# Altium PCB BlueSource.PcbDoc
Units mm, origin at the board's own origin, x right, y up, seen from the top; angles counter-clockwise.
Board outline 50 x 47 mm, 6 copper layers (Top Layer, L1, L2, L3, L4, Bottom Layer), stack 1.65 mm thick; 47 components, 29 nets, 127 pads, 67 vias.
Unrouted connection lines stored in the file: 1.
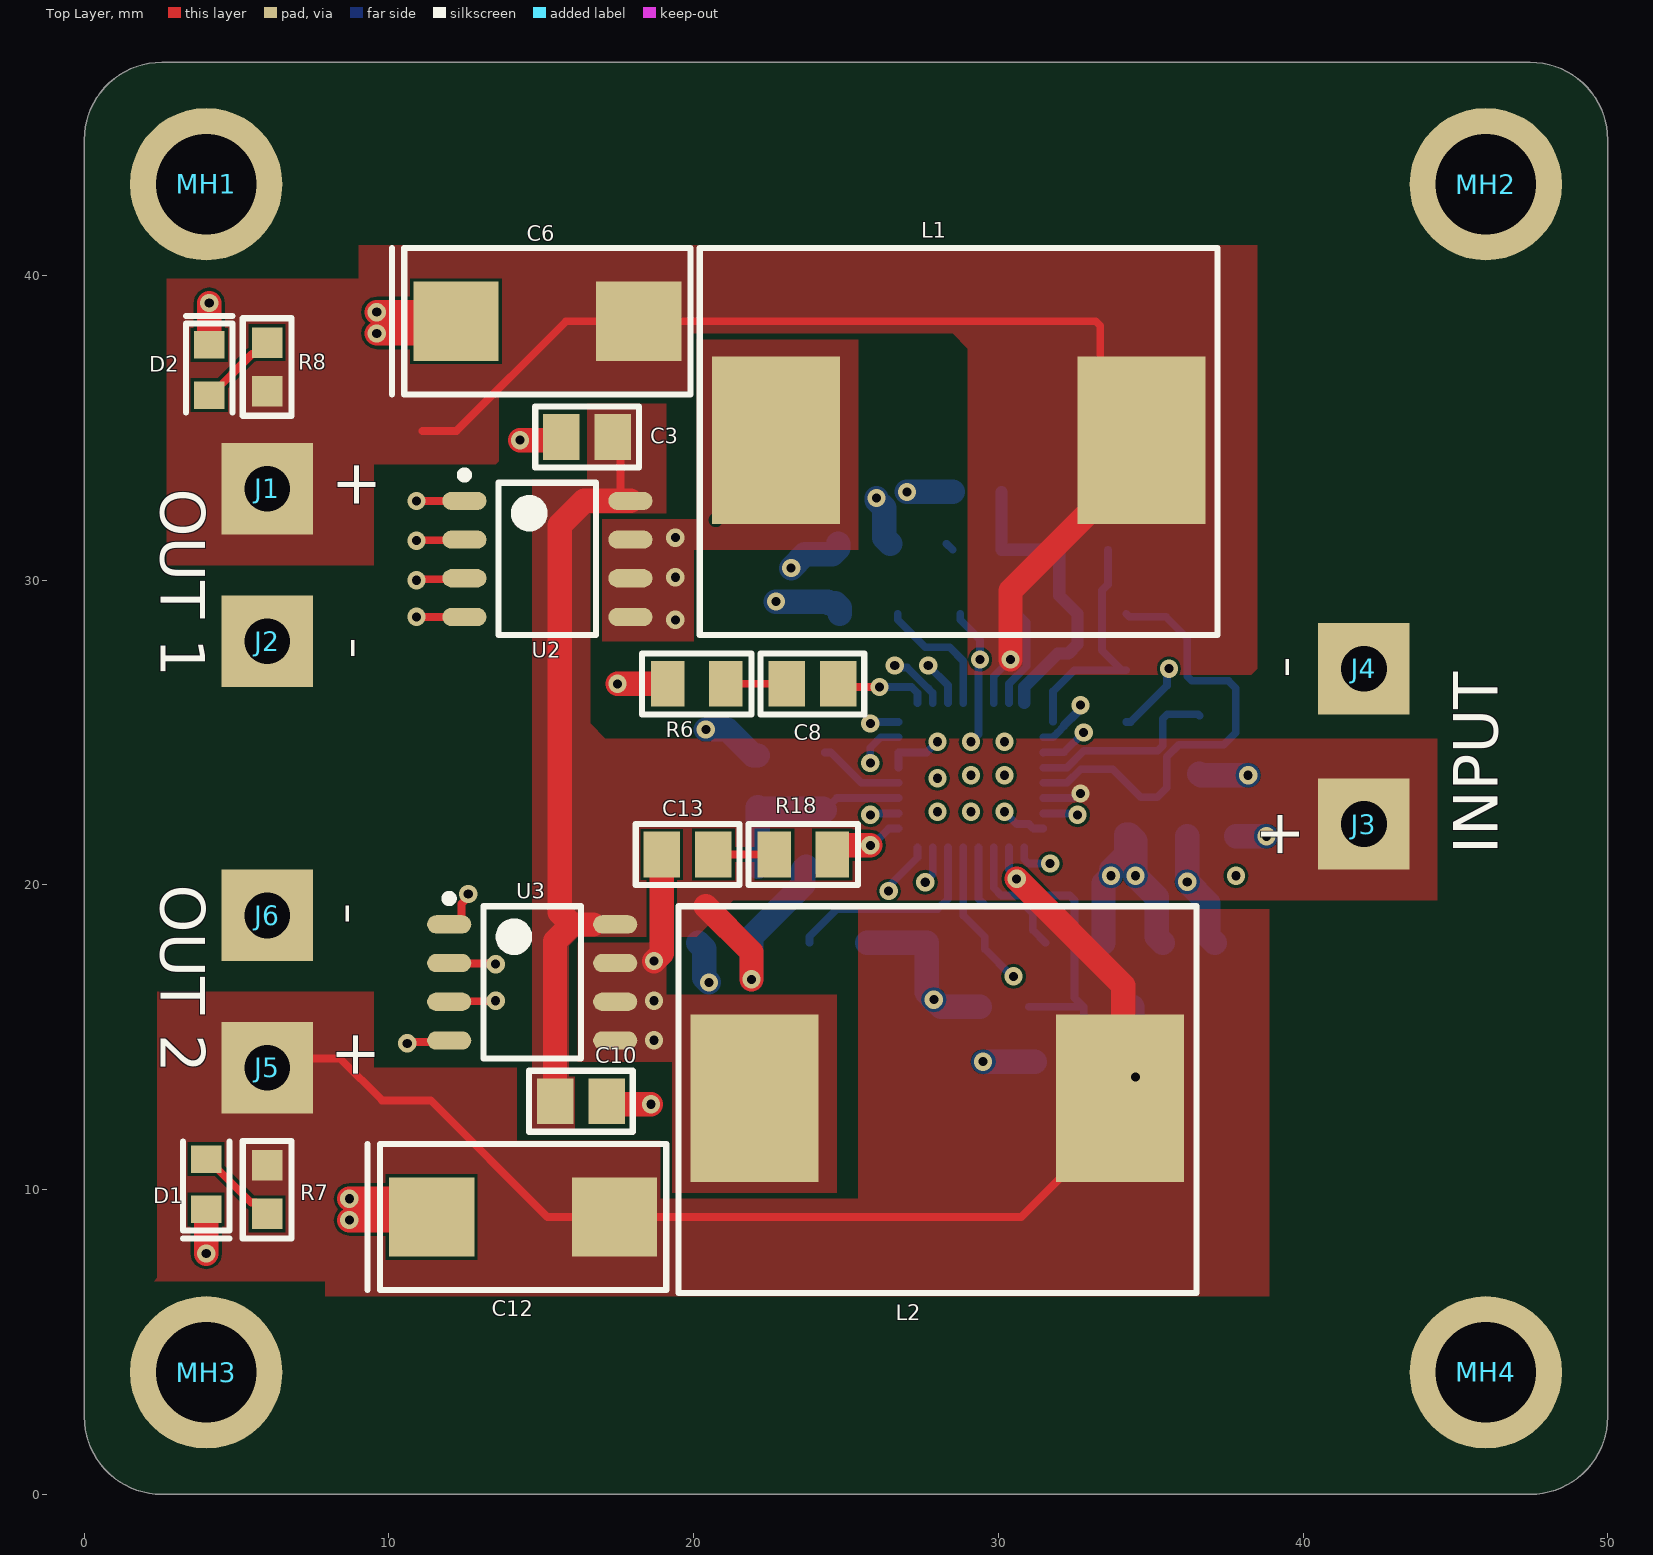
[diagram p0: Top Layer view]
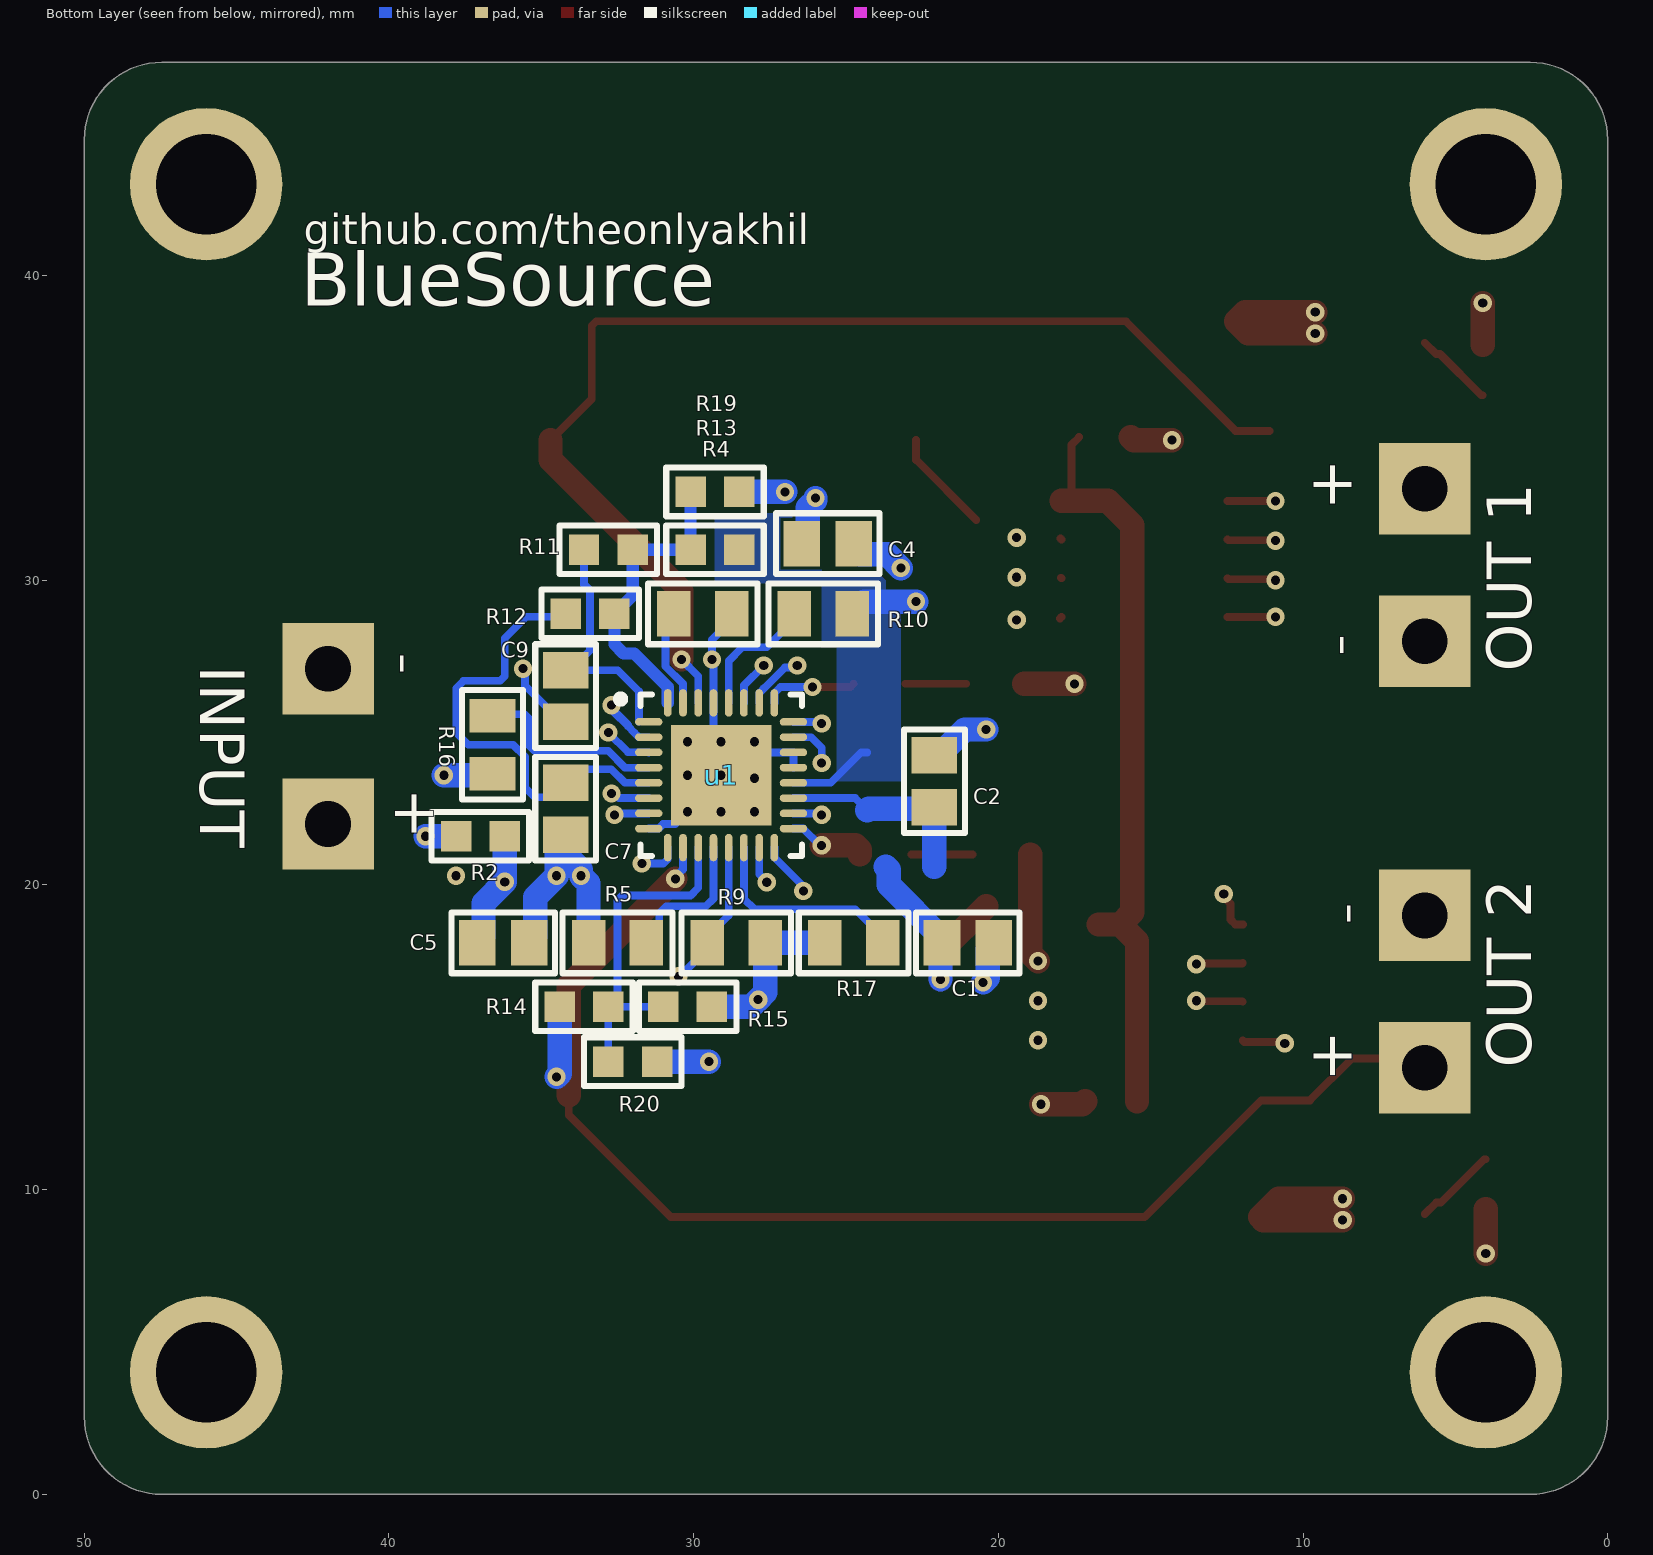
[diagram p1: Bottom Layer view, seen from below]
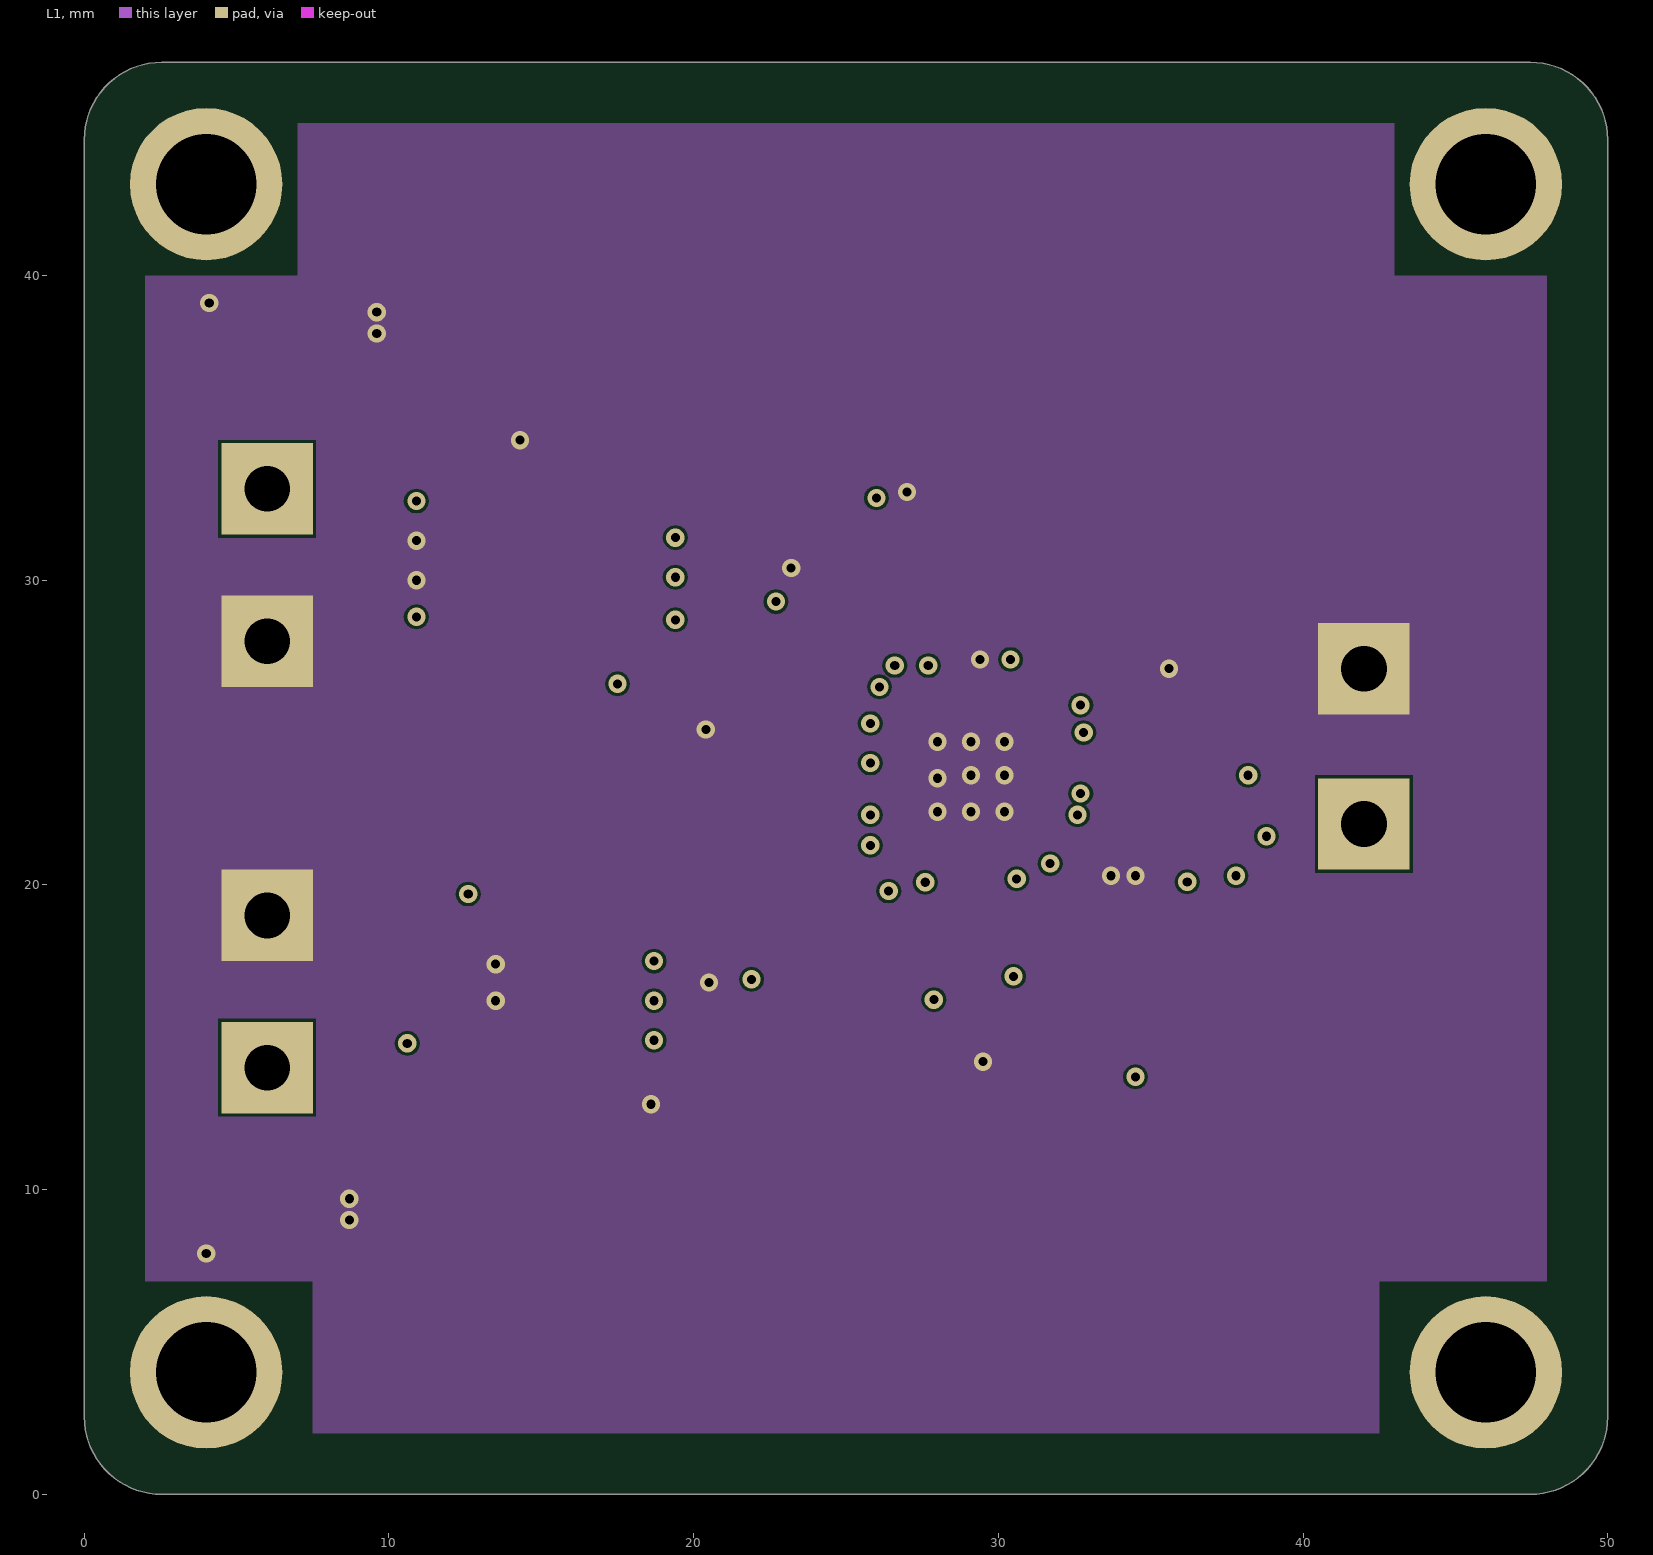
[diagram p2: L1]
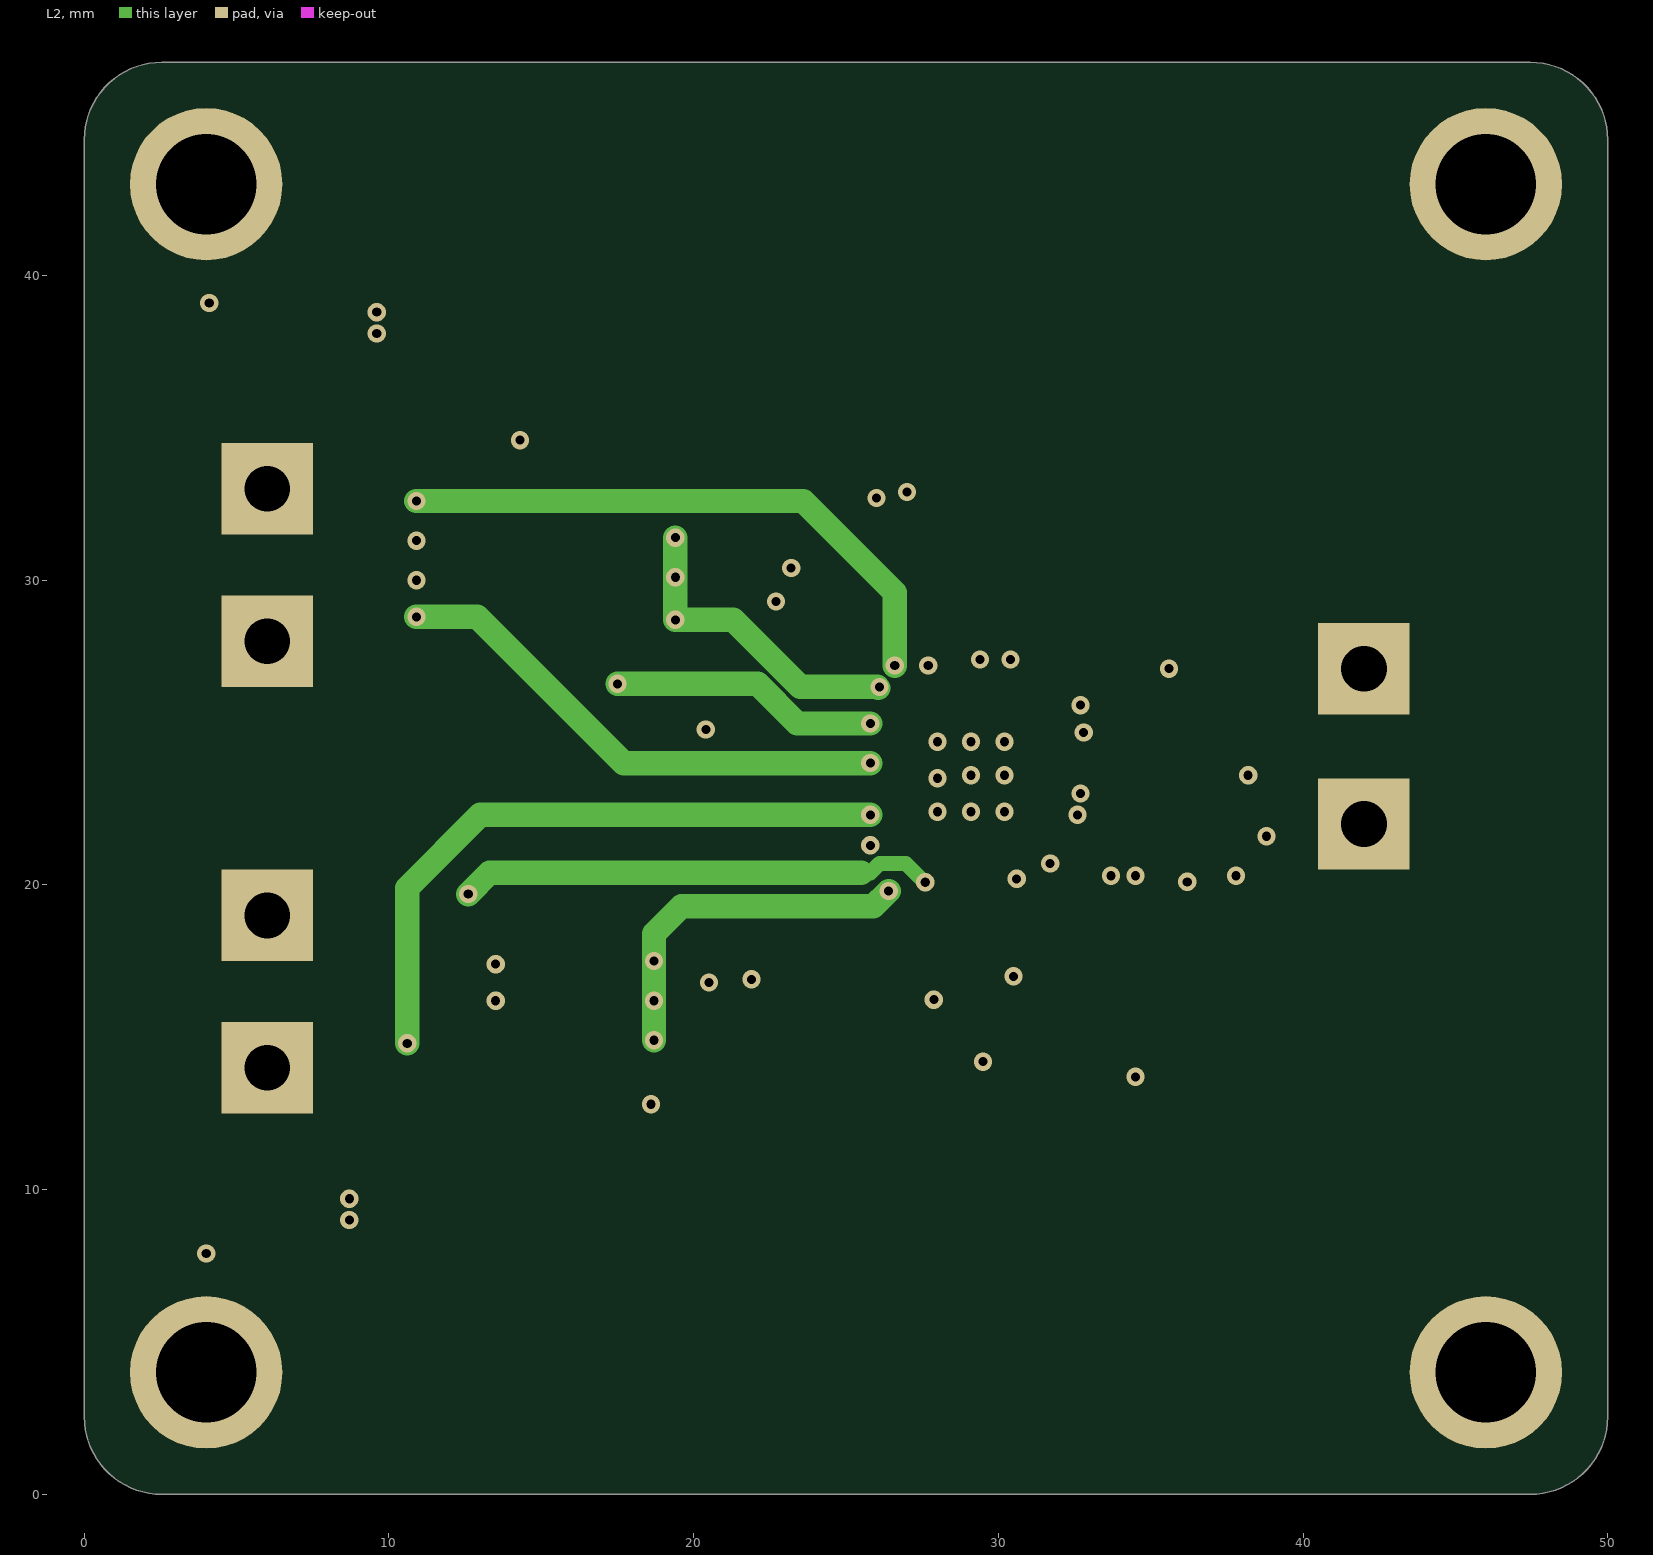
[diagram p3: L2]
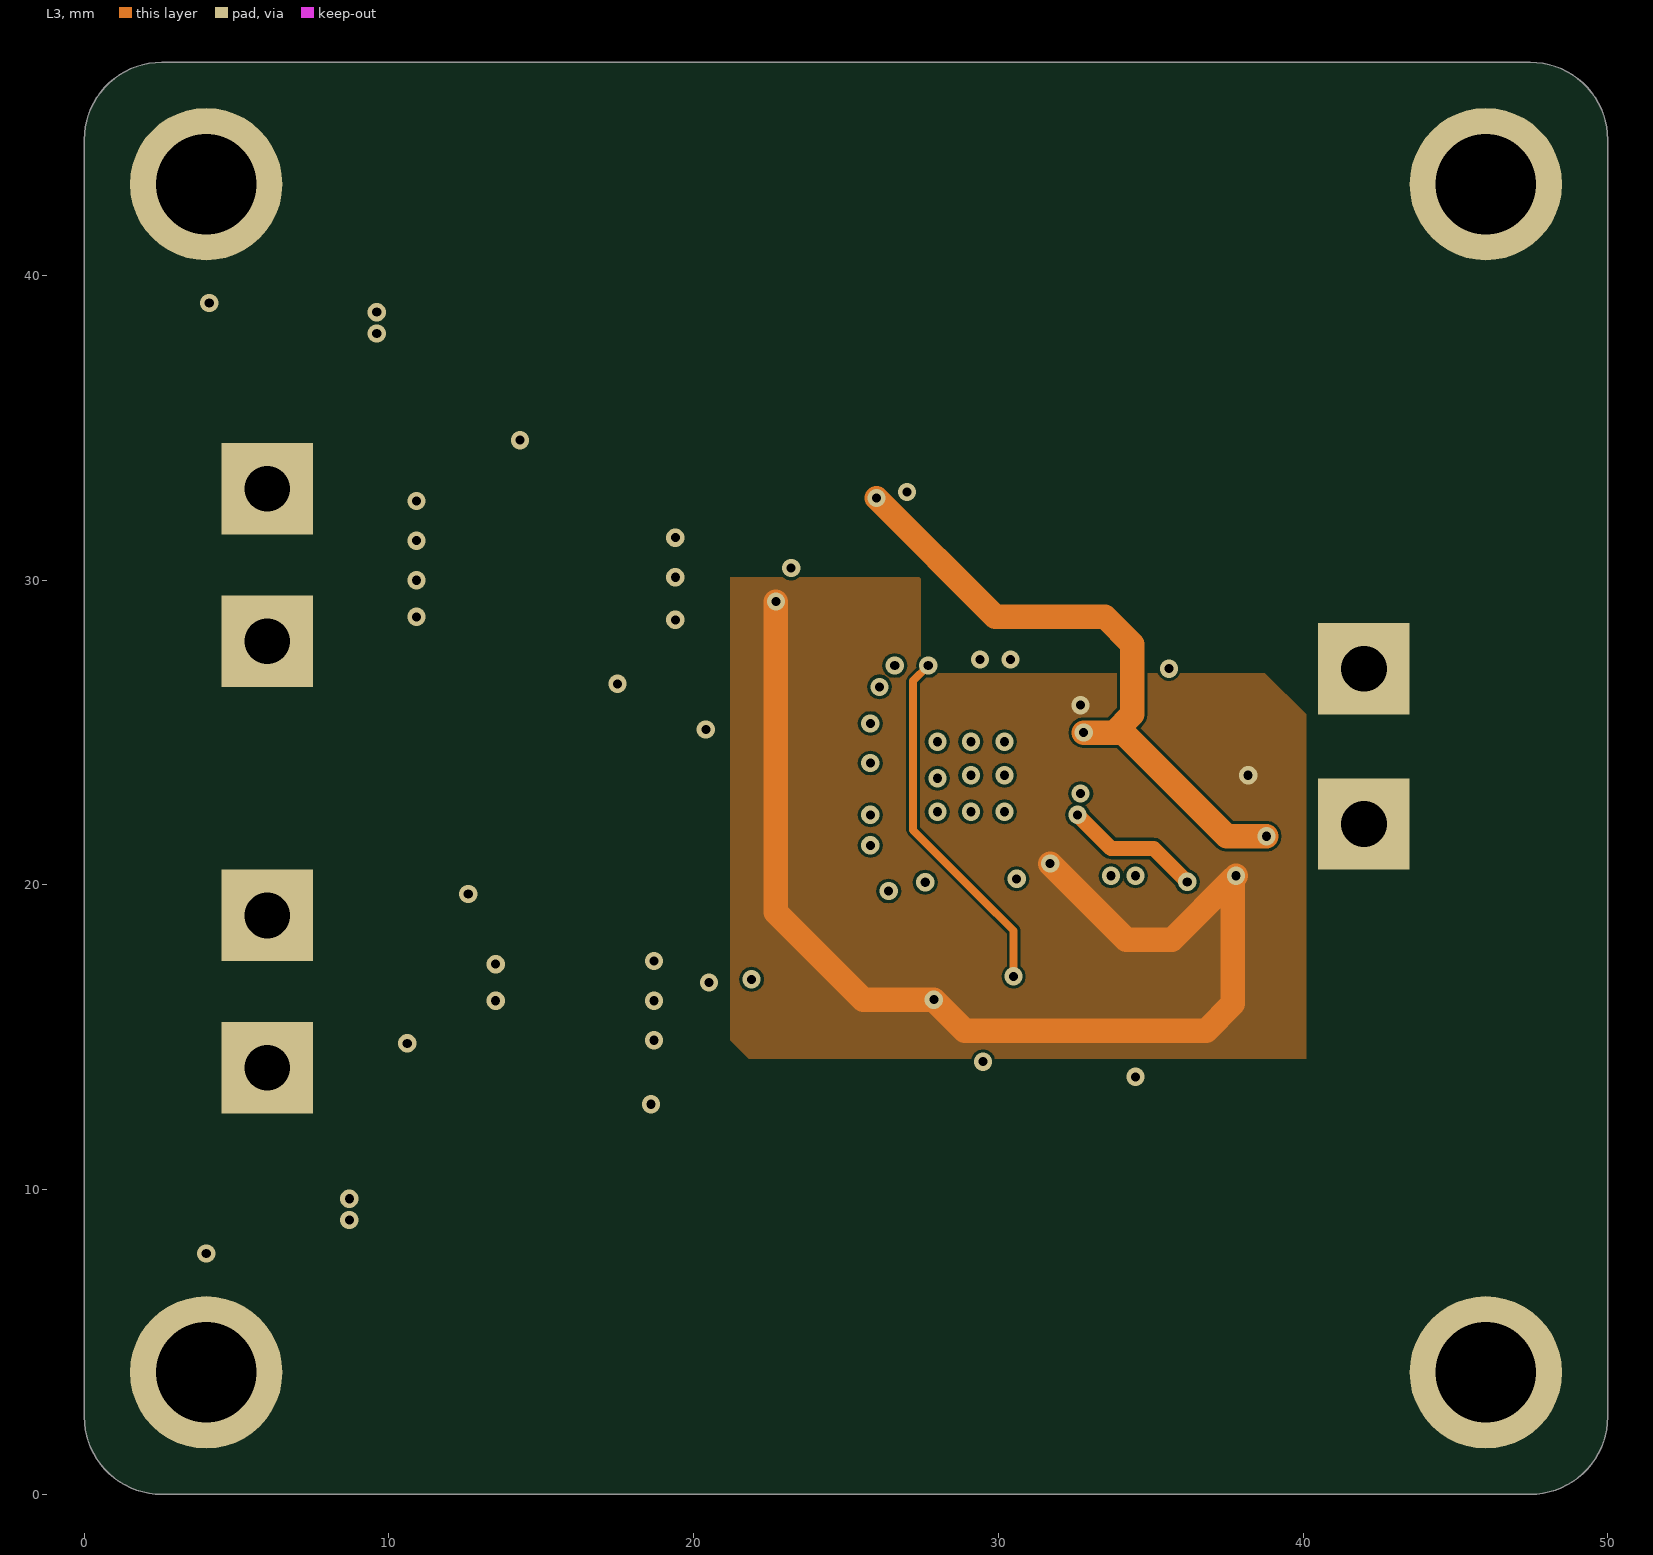
[diagram p4: L3]
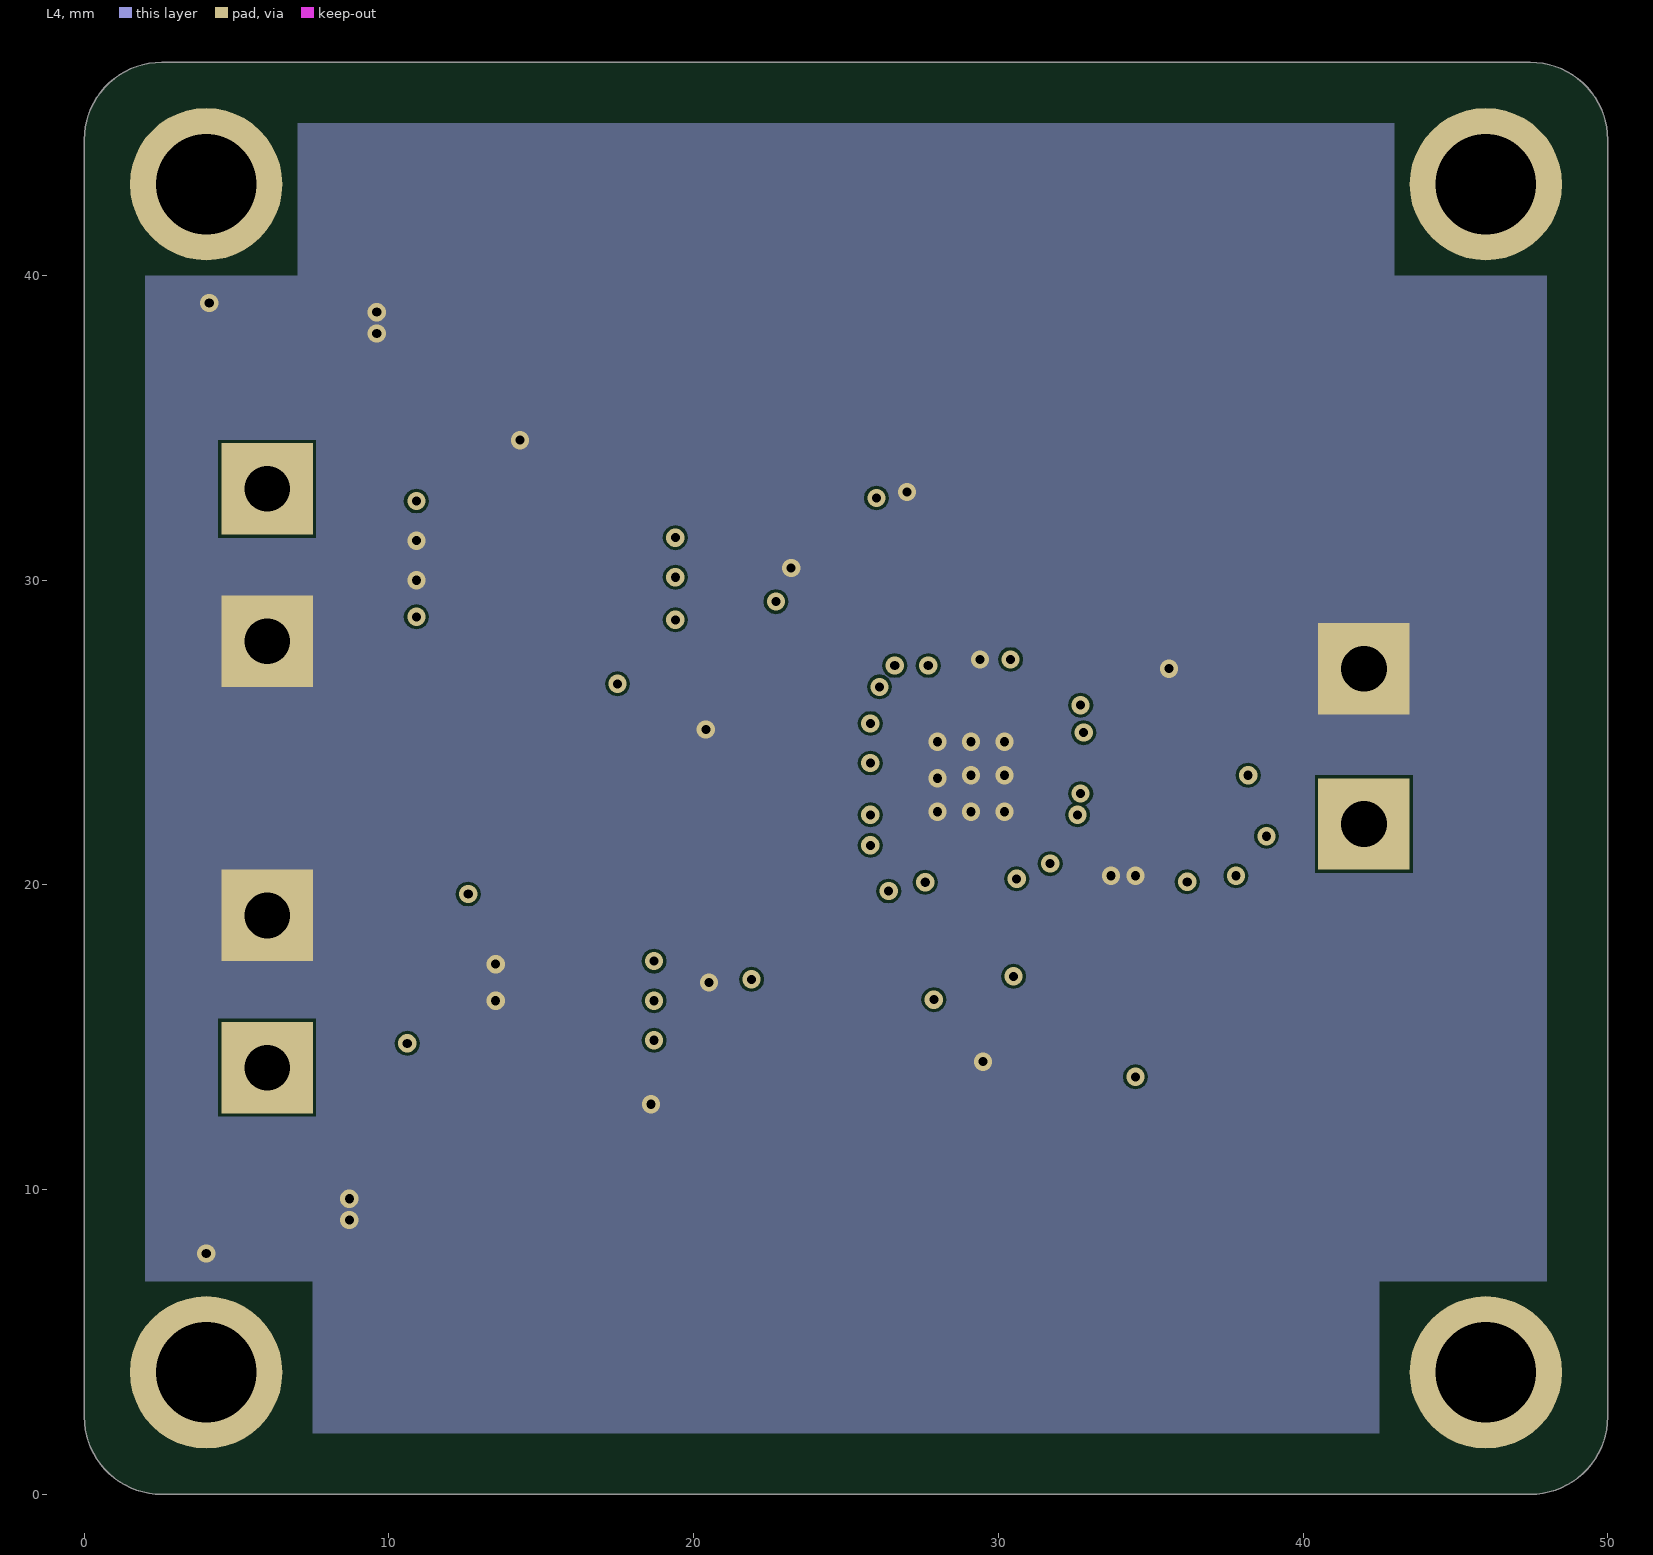
[diagram p5: L4]
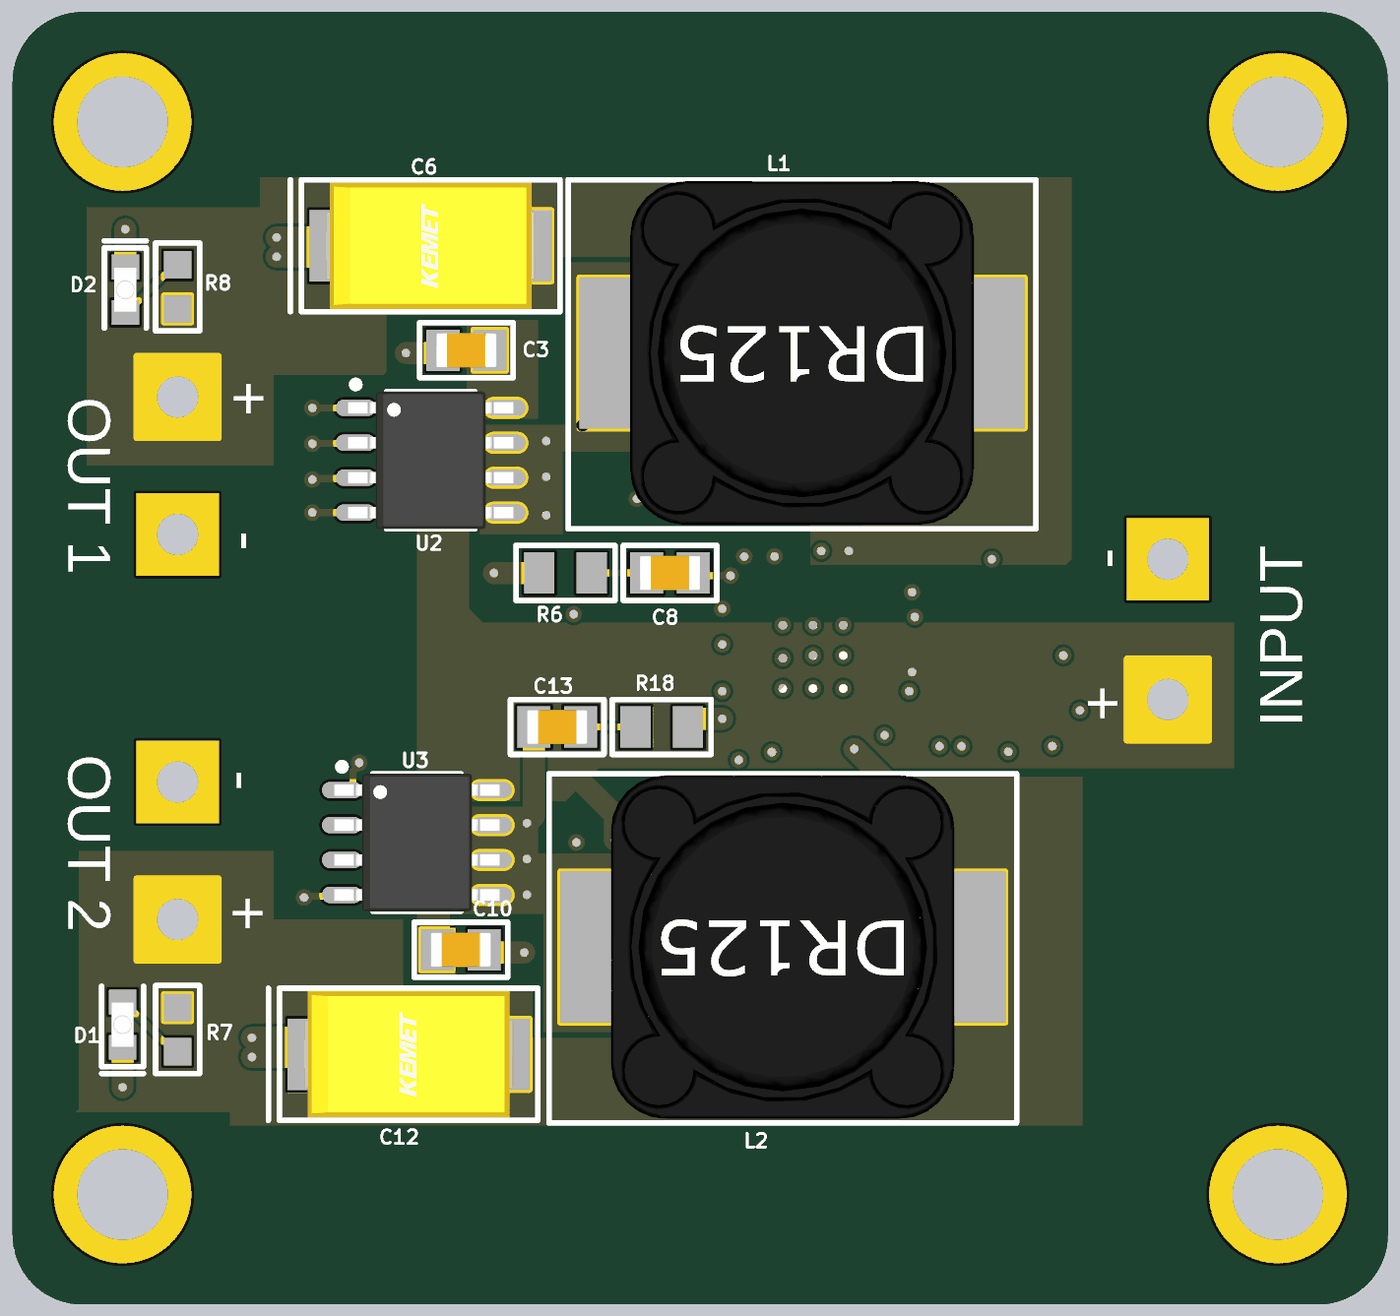
[diagram p6: 3D render of the assembled board from above, using the file's embedded part models]

## Layer stack, top to bottom
Top Solder: solder mask 0.0102, Solder Resist, Dk 3.5
Top Layer: signal copper 0.035
Dielectric 4: prepreg 0.12, PP-006, Dk 4.1
L1: signal copper 0.035
Dielectric 2: prepreg 0.36, PP-006, Dk 4.1
L2: signal copper 0.035
Dielectric 1: dielectric 0.48, FR-4, Dk 4.8
L3: signal copper 0.035
Dielectric 3: prepreg 0.36, PP-006, Dk 4.1
L4: signal copper 0.035
Dielectric 5: prepreg 0.12, PP-006, Dk 4.1
Bottom Layer: signal copper 0.035
Bottom Solder: solder mask 0.0102, Solder Resist, Dk 3.5

## Board outline
2.54,0 cw(c2.54,2.54) 0,2.54 0,44.46 cw(c2.54,44.46) 2.54,47 47.46,47 cw(c47.46,44.46) 50,44.46 50,2.54 cw(c47.46,2.54) 47.46,0

## Design rules (kind name [scope] priority, off if disabled: settings)
Clearance [All] p1: gap=0.1 ignorepadtopadclearanceinfootprint=FALSE
HoleToHoleClearance [All] p1: gap=0.305 allowstackedmicrovias=TRUE
MinimumSolderMaskSliver [All] p1: minsoldermaskwidth=0.1
PolygonConnect [All] p1: connectstyle=Direct reliefconductorwidth=0.254 reliefentries=4 polygonreliefangle="90 Angle" airgapwidth=0.254
RoutingVias [All] p1: holewidth=0.711 width=1.27 viastyle="Through Hole" minholewidth=0.711 minwidth=1.27 maxholewidth=0.711 maxwidth=1.27
SilkToSilkClearance [All] p1: silktosilkclearance=0.1
SilkToSolderMaskClearance [IsPad] p1: minsilkscreentomaskgap=0.1 clearancetoexposedcopper=TRUE
SolderMaskExpansion [All] p1: expansion=0.102 istentingtop=FALSE
UnRoutedNet [All] p1 off: checkbadconnections=TRUE
Width [All] p1: maxlimit=2 minlimit=0.254 preferedwidth=0.254 minimp=50.000000 maximp=50.000000 favimp=50.000000
25 further rules are at their usual default settings.

## Components (designator, comment, footprint, x,y, rotation, side; value= is the part's Value field where it differs from the comment)
C1 "1uF (50V)" Capacitor_0805 21,18.1 r0 bottom
C2 "1uF (50V)" Capacitor_0805 22.1,23.4 r270 bottom
C3 "10uF (35V)" Capacitor_0805 16.5,34.7 r0 top
C4 "1uF (50V)" Capacitor_0805 25.6,31.2 r180 bottom
C5 "4.7uF (10V)" Capacitor_0805 36.25,18.1 r0 bottom
C6 "330uF (10V)" C7343 15.2,38.5 r0 top
C7 "0.01uF (50V)" Capacitor_0805 34.2,22.5 r270 bottom
C8 "0.22uF (50V)" Capacitor_0805 23.9,26.6 r180 top
C9 "0.1uF(50V)" Capacitor_0805 34.2,26.2 r270 bottom
C10 "10uF (35V)" Capacitor_0805 16.3,12.9 r180 top
C12 "330uF (10V)" C7343 14.4,9.1 r0 top
C13 "0.22uF (50V)" Capacitor_0805 19.8,21 r0 top
D1 "LED GREEN" 0603_LED 4,10.175 r270 top
D2 "LED GREEN" 0603_LED 4.1,36.9 r90 top
J1 "MLPAD_3x3" MLPAD_3X3 6,33 r0 top
J2 "MLPAD_3x3" MLPAD_3X3 6,28 r0 top
J3 "MLPAD_3x3" MLPAD_3X3 42,22 r0 top
J4 "MLPAD_3x3" MLPAD_3X3 42,27.1 r0 top
J5 "MLPAD_3x3" MLPAD_3X3 6,14 r0 top
J6 "MLPAD_3x3" MLPAD_3X3 6,19 r0 top
L1 "6.8uH" DR125_Inductor 28.7,34.6 r0 top
L2 "8.2uH" DR125_Inductor 28,13 r0 top
MH1 "Mounting Hole" Mounting_Hole_3.3mm 4,43 r0 top
MH2 "Mounting Hole" Mounting_Hole_3.3mm 46,43 r0 top
MH3 "Mounting Hole" Mounting_Hole_3.3mm 4,4 r0 top
MH4 "Mounting Hole" Mounting_Hole_3.3mm 46,4 r0 top
R2 "0R(0603 in )" RESISTOR0603 37,21.6 r180 bottom
R4 "200K (1%)" RESISTOR0805 29.7,28.9 r180 bottom
R5 "200K (1%)" RESISTOR0805 32.5,18.1 r0 bottom
R6 "1R 1%" RESISTOR0805 20.1,26.6 r180 top
R7 "220R" RESISTOR0603 6,10 r90 top
R8 "165R(1%)" RESISTOR0603 6,37 r270 top
R9 "200K (1%)" RESISTOR0805 28.6,18.1 r180 bottom
R10 "200K (1%)" RESISTOR0805 25.75,28.9 r180 bottom
R11 "0R(0603 in )" RESISTOR0603 32.8,31 r0 bottom
R12 "0R(0603 in )" RESISTOR0603 33.4,28.9 r0 bottom
R13 "0R(0603 in )" RESISTOR0603 29.3,31 r180 bottom
R14 "0R(0603 in )" RESISTOR0603 33.6,16 r0 bottom
R15 "0R(0603 in )" RESISTOR0603 30.2,16 r180 bottom
R16 "10K" RESISTOR0805 36.6,24.6 r270 bottom
R17 "10K" RESISTOR0805 24.75,18.1 r0 bottom
R18 "1R 1%" RESISTOR0805 23.6,21 r0 top
R19 "0R(0603 in )" RESISTOR0603 29.3,32.9 r0 bottom
R20 "0R(0603 in )" RESISTOR0603 32,14.2 r0 bottom
u1 "ISL6236AIRZ" 32QFN 29.1,23.6 r180 bottom (schematic designator U1)
U2 "SI4816BDY-T1-E3" SOIC-8 15.2,30.7 r0 top
U3 "SI4816BDY-T1-E3" SOIC-8 14.7,16.8 r0 top

## Footprints (in the part's own frame and the unit in brackets; to place one, negate y for a bottom-side part, rotate by r counter-clockwise, add the part's x,y. Pads: shape width x height; smd on the part's side, far side on the other; paste and mask are expansions set on the pad)
32QFN [mm]
  oval 0.9x0.25 smd paste+0 mask+0: 1(-2.375,1.75)
  oval 0.9x0.25 smd mask+0.06: 2(-2.375,1.25) 3(-2.375,0.75) 4(-2.375,0.25) 5(-2.375,-0.25) 6(-2.375,-0.75) 7(-2.375,-1.25) 18(2.375,-1.25) 19(2.375,-0.75) 20(2.375,-0.25) 21(2.375,0.25) 22(2.375,0.75) 23(2.375,1.25)
  oval 0.9x0.25 smd mask+0: 8(-2.375,-1.75) 17(2.375,-1.75) 24(2.375,1.75)
  oval 0.25x0.9 smd mask+0: 9(-1.75,-2.375) 16(1.75,-2.375) 25(1.75,2.375) 32(-1.75,2.375)
  oval 0.25x0.9 smd mask+0.06: 10(-1.25,-2.375) 11(-0.75,-2.375) 12(-0.25,-2.375) 13(0.25,-2.375) 14(0.75,-2.375) 15(1.25,-2.375) 26(1.25,2.375) 27(0.75,2.375) 28(0.25,2.375) 29(-0.25,2.375) 30(-0.75,2.375) 31(-1.25,2.375)
  rect 3.3x3.3 smd mask+0.102: EP(0,0)
  silkscreen extent -3.42,-2.65 2.65,2.65, body extent -2.58,-2.58 2.58,2.58, height 1
0603_LED [mm] "SMD 0603 LED"
  rect 0.9x1 smd: 1(-0.825,0) 2(0.825,0)
  silkscreen extent -1.4,-0.76 1.78,0.76, body extent -0.8,-0.4 0.8,0.4, height 0.96
C7343 [mm]
  rect 2.8x2.6 smd: 1(-3,0) 2(3,0)
  silkscreen extent -5.1,-2.4 4.7,2.4, body extent -3.8,-2.3 3.8,2.3, height 4.31
Capacitor_0805 [mm] "Capacior 0805"
  rect 1.2x1.5 smd: 1(-0.85,0) 2(0.85,0)
  silkscreen extent -1.7,-1 1.7,1, body extent -1.1,-0.62 1.1,0.62, height 0.8
DR125_Inductor [mm]
  rect 4.2x5.5 smd: 1(-6,0) 2(6,0)
  silkscreen extent -8.5,-6.4 8.5,6.3, body extent -6.25,-6.25 6.25,6.25, height 8.01
MLPAD_3X3 [mm]
  rect 3x3 hole 1.5: 1(0,0)
Mounting_Hole_3.3mm [mm] "3.3mm Mounting Holes"
  round 5 hole 3.3: 1(0,0)
RESISTOR0603 [mm]
  rect 1x1 smd: 1(-0.8,0) 2(0.8,0)
  silkscreen extent -1.6,-0.8 1.6,0.8, body extent -0.9,-0.45 0.9,0.45, height 0.45
RESISTOR0805 [mm]
  rect 1.1x1.5 smd: 1(-0.95,0) 2(0.95,0)
  silkscreen extent -1.8,-1 1.8,1, body extent -1.1,-0.67 1.1,0.67, height 0.6
SOIC-8 [mm] "SOIC, 8-Leads, Body 4.90x3.90mm, Pitch 1.27mm, IPC Medium Density"
  oval 1.45x0.6 smd: 1(-2.725,1.905) 2(-2.725,0.635) 3(-2.725,-0.635) 4(-2.725,-1.905) 5(2.725,-1.905) 6(2.725,-0.635) 7(2.725,0.635) 8(2.725,1.905)
  silkscreen extent -2.85,-2.5 1.6,2.88, body extent -3,-2.5 3,2.5, height 1.7

## Part data
C1 C2 C4: library part CC0805JKX7R9BB105, "1µF ±5% 50V Ceramic Capacitor X7R 0805 (2012 Metric)", Manufacturer=Yageo, MaxTemp=125°C, MinTemp=-55°C, SupplierPartNumber=311-3498-1-ND, ComponentLink1Description=SupplierURL, ComponentLink1URL=https://www.digikey.com/en/products/detail/yageo/CC0805JKX7R9BB105/7164382, ManufacturerPartNumber=CC0805JKX7R9BB105, PartStatus=Active, Price=0.35, Supplier=Digikey
C3 C10: library part C2012X5R1V106K125AC, "10µF ±10% 35V Ceramic Capacitor X5R 0805 (2012 Metric)", Manufacturer="TDK Corporation", MaxTemp=85°C, MinTemp=-55°C, SupplierPartNumber=445-14418-1-ND, ComponentLink1Description=SupplierURL, ComponentLink1URL=https://www.digikey.com/en/products/detail/tdk-corporation/C2012X5R1V106K125AC/3951654, ManufacturerPartNumber=C2012X5R1V106K125AC, PartStatus=Active, Price=0.70000, Supplier=Digikey
C5: library part C0805C475J8RACAUTO, "4.7µF ±5% 10V Ceramic Capacitor X7R 0805 (2012 Metric)", Manufacturer=KEMET, MaxTemp=125°C, MinTemp=-55°C, SupplierPartNumber=399-15708-1-ND, ComponentLink1Description=SupplierURL, ComponentLink1URL=https://www.digikey.com/en/products/detail/kemet/C0805C475J8RACAUTO/7427538, ManufacturerPartNumber=C0805C475J8RACAUTO, PartStatus=Active, Price=0.53, Supplier=Digikey
C6 C12: library part T530X337M010ATE004, "330µF Molded Tantalum Polymer Capacitor 10V 2917 (7343 Metric) 4mOhm @ 100kHz", Manufacturer=KEMET, MaxTemp=125°C, MinTemp=-55°C, SupplierPartNumber=399-10378-1-ND, ComponentLink1Description=SupplierURL, ComponentLink1URL=https://www.digikey.com/en/products/detail/kemet/T530X337M010ATE004/3760653, ManufacturerPartNumber=T530X337M010ATE004, PartStatus=Active, Price=5.57, Supplier=Digikey
C7: library part C0805C103J5HACAUTO, "10000pF ±5% 50V Ceramic Capacitor X8R 0805 (2012 Metric)", Manufacturer=KEMET, MaxTemp=150°C, MinTemp=-55°C, SupplierPartNumber=399-15977-1-ND, ComponentLink1Description=SupplierURL, ComponentLink1URL=https://www.digikey.com/en/products/detail/kemet/C0805C103J5HACAUTO/7516211, ManufacturerPartNumber=C0805C103J5HACAUTO, PartStatus=Active, Price=0.79, Supplier=Digikey
C8 C13: library part C0805C224J5RACAUTO, "0.22µF ±5% 50V Ceramic Capacitor X7R 0805 (2012 Metric)", Manufacturer=399-C0805C224J5RACAUTOCT-ND, MaxTemp=125°C, MinTemp=-55°C, ComponentLink1Description=SupplierURL, ComponentLink1URL=https://www.digikey.com/en/products/detail/kemet/C0805C224J5RACAUTO/10642470, ManufacturerPartNumber=C0805C224J5RACAUTO, PartStatus=Active, Price=0.84, Supplier=Digikey, SupplierPartNumber=399-C0805C224J5RACAUTOCT-ND
C9: library part C0805C104J5RACTU, "0.1µF ±5% 50V Ceramic Capacitor X7R 0805 (2012 Metric)", Manufacturer=KEMET, MaxTemp=125°C, MinTemp=-55°C, SupplierPartNumber=399-1171-1-ND, ComponentLink1Description=SupplierURL, ComponentLink1URL=https://www.digikey.com/en/products/detail/kemet/C0805C104J5RACTU/411170, ManufacturerPartNumber=C0805C104J5RACTU, PartStatus=Active, Price=0.20, Supplier=Digikey
D1 D2: library part XZVG53W-8, "Green 570nm LED Indication - Discrete 2.1V 0603 (1608 Metric)", Max Temp=+85°C, Min Temp=-40°C, Supplier Part Number=1497-1215-1-ND, ComponentLink1Description="Supplier Link", ComponentLink1URL=https://www.digikey.com/en/products/detail/sunled/XZVG53W-8/4745971, Manufacturer Part Number=XZVG53W-8, Part Status=Active, Price=0.36
J1 J2 J3 J4 J5 J6: library part MLPAD_3X3
L1: library part DR125-6R8-R, "6.8µH Shielded Wirewound Inductor 6.64A 12.3mOhm Nonstandard", Manufacturer="Eaton - Electronics Division", MaxTemp=125°C, MinTemp=-40°C, SupplierPartNumber=513-1530-1-ND, ComponentLink1Description=SupplierURL, ComponentLink1URL=https://www.digikey.com/en/products/detail/eaton-electronics-division/DR125-6R8-R/667158, ManufacturerPartNumber=DR125-6R8-R, PartStatus=Active, Price=1.22, Suppplier=Digikey
L2: library part DR125-8R2-R, "8.2µH Shielded Wirewound Inductor 5.54A 17.6mOhm Nonstandard", Manufacturer="Eaton - Electronics Division", MaxTemp=125°C, MinTemp=-40°C, SupplierPartNumber=513-1823-1-ND, ComponentLink1Description=SupplierURL, ComponentLink1URL=https://www.digikey.com/en/products/detail/eaton-electronics-division/DR125-8R2-R/667161, ManufacturerPartNumber=DR125-8R2-R, PartStatus=Active, Price=1.22, Supplier=Digikey
MH1 MH2 MH3 MH4: library part 3MM_MOUNTING_HOLE, "3.3mm Mounting Hole"
R2 R11 R12 R13 R14 R15 R19 R20: library part RMCF0603ZT0R00, "0 Ohms Jumper 0.1W, 1/10W Chip Resistor 0603 (1608 Metric) Automotive AEC-Q200 Thick Film", Max Temp=155°C, Min Temp=-55°C, Supplier Part Number=RMCF0603ZT0R00CT-ND, ComponentLink1Description="Supplier Link", ComponentLink1URL=https://www.digikey.com/en/products/detail/stackpole-electronics-inc/RMCF0603ZT0R00/1756908, Manufacturer Part Number=RMCF0603ZT0R00, Part Status=Active, Price=0.10
R4 R5 R9 R10: library part ERJ-6ENF2003V, "200 kOhms ±1% 0.125W, 1/8W Chip Resistor 0805 (2012 Metric) Automotive AEC-Q200 Thick Film", Manufacturer="Panasonic Electronic Components", MaxTemp=155°C, MinTemp=-55°C, SupplierPartNumber=P200KCCT-ND, ComponentLink1Description=SupplierURL, ComponentLink1URL=https://www.digikey.com/en/products/detail/panasonic-electronic-components/ERJ-6ENF2003V/111933, ManufacturerPartNumber=ERJ-6ENF2003V, PartStatus=Active, Price=0.10, Supplier=Digikey
R6 R18: library part ERJ-6RQF1R0V, "1 Ohms ±1% 0.125W, 1/8W Chip Resistor 0805 (2012 Metric) Automotive AEC-Q200, Current Sense Thick Film", Manufacturer="Panasonic Electronic Components", MaxTemp=155°C, MinTemp=-55°C, SupplierPartNumber=P1.0DCT-ND, ComponentLink1Description=SupplierURL, ComponentLink1URL=https://www.digikey.com/en/products/detail/panasonic-electronic-components/ERJ-6RQF1R0V/250172, ManufacturerPartNumber=ERJ-6RQF1R0V, PartStatus=Active, Price=0.32, Supplier=Digikey
R7: library part RMCF0603JT220R, "220 Ohms ±5% 0.1W, 1/10W Chip Resistor 0603 (1608 Metric) Automotive AEC-Q200 Thick Film", Manufacturer="Stackpole Electronics Inc", MaxTemp=155°C, MinTemp=-55°C, SupplierPartNumber=RMCF0603JT220RCT-ND, ComponentLink1Description=SupplierURL, ComponentLink1URL=https://www.digikey.com/en/products/detail/stackpole-electronics-inc/RMCF0603JT220R/1758014, ManufacturerPartNumber=RMCF0603JT220R, PartStatus=Active, Price=0.10, Supplier=Digikey
R8: library part RMCF0603FT165R, "165 Ohms ±1% 0.1W, 1/10W Chip Resistor 0603 (1608 Metric) Automotive AEC-Q200 Thick Film", Manufacturer="Stackpole Electronics Inc", MaxTemp=155°C, MinTemp=-55°C, SupplierPartNumber=RMCF0603FT165RCT-ND, ComponentLink1Description=SupplierURL, ComponentLink1URL=https://www.digikey.com/en/products/detail/stackpole-electronics-inc/RMCF0603FT165R/1713658, ManufacturerPartNumber=RMCF0603FT165R, PartStatus=Active, Price=0.10, Supplier=Digikey
R16 R17: library part ERJ-6GEYJ103V, "10 kOhms ±5% 0.125W, 1/8W Chip Resistor 0805 (2012 Metric) Automotive AEC-Q200 Thick Film", Manufacturer="Panasonic Electronic Components", MaxTemp=155°C, MinTemp=-55°C, SupplierPartNumber=P10KACT-ND, ComponentLink1Description=SupplierURL, ComponentLink1URL=https://www.digikey.com/en/products/detail/panasonic-electronic-components/ERJ-6GEYJ103V/83062, ManufacturerPartNumber=ERJ-6GEYJ103V, PartStatus=Active, Price=0.10, Supplier=Digikey
u1: "- Controller, Notebook Power System Voltage Regulator IC 4 Output 32-QFN (5x5)", Manufacturer="Renesas Electronics America Inc", MaxTemp=100°C, MinTemp=-40°C, SupplierPartNumber=ISL6236AIRZ-ND, ComponentLink1Description=SupplierURL, ComponentLink1URL=https://www.digikey.com/en/products/detail/renesas-electronics-america-inc/ISL6236AIRZ/1976644, ManufacturerPartNumber=ISL6236AIRZ, Price=3.90080, Supplier=Digikey
U2 U3: "Mosfet Array 2 N-Channel (Half Bridge) 30V 5.8A, 8.2A 1W, 1.25W Surface Mount 8-SO", Manufacturer="Vishay Siliconix", MaxTemp=150°C, MinTemp=-55°C, SupplierPartNumber=SI4816BDY-T1-E3CT-ND, ManufacturerPartNumber=SI4816BDY-T1-E3, PartStatus=Active, Price=1.56, Supplier=Digikey, SupplierURL=https://www.digikey.com/en/products/detail/vishay-siliconix/SI4816BDY-T1-E3/1656470

## Via types
v1: diameter 0.6/0.6/0.6/0.6/0.6/0.6 (per signal layer), hole 0.3, Top Layer to Bottom Layer, tented both sides, 67 vias

## Nets (pads, with @x,y where several pads share a name; then routed paths per layer and width w, separated by ;. In a path a pad name is that pad's centre, name@x,y a point inside that pad or via, vN(x,y) a via of type N, cw(c..) or ccw(c..) an arc to the next point about the centre after c; other vN are vias at no path point)
+3V3: C6.2 J1.1 L1.2 R8.2 u1.30 | length 40.7
  Top Layer w0.254: J1.1 J1.1@7.373,34.373 ; 11.1,34.9 12.213,34.9 15.813,38.5 C6.2 33.2,38.5 33.349,38.351 33.349,35.951 L1.2
  Top Layer w0.8: v1(30.4,27.4) 30.4,29.65 34.7,33.95 L1.2
  Bottom Layer w0.254: u1.30 29.85,26.85 v1(30.4,27.4)
+5_VCC: C2.2 R9.2 R10.2 R13.2 R15.2 R16.2 R17.2 u1.2 u1.9 u1.19 u1.20 | length 62.7
  L3 w0.8: v1(22.7,29.3) 22.7,19.1 25.566,16.234 v1(27.884,16.234) 28.9,15.219 36.819,15.219 37.7,16.1 v1@37.7,20.2 ; v1(31.7,20.7) 34.2,18.2 35.7,18.2 v1@37.7,20.2 ; v1(37.8,20.3) v1@37.7,20.2
  Bottom Layer w0.254: 24.3,22.45 24.7,22.85 u1.19 ; 24.3,24.35 24.5,24.35 25.5,23.35 u1.20 ; R13.2@28.3,31.2 R13.2 ; u1.9 30.851,21.224 30.851,20.849 31,20.7 v1(31.7,20.7) ; u1.2 31.796,24.85 31.944,24.998 31.946,24.998 32.152,25.204 ; 32.152,25.204 32.634,25.686 v1@32.634,25.74 ; 32.152,25.204 32.152,25.252 32.527,25.627 32.527,25.633 v1@32.634,25.74 ; v1@32.634,25.74 32.7,25.806 v1(32.7,25.9) 32.634,25.834 v1@32.634,25.74
  Bottom Layer w0.8: 22.1,20.6 C2.2 22.15,22.5 24.25,22.5 24.3,22.45 ; v1(22.7,29.3) 24.4,29.3 24.45,29.25 24.65,29.25 24.8,29.1 R10.2 ; R17.2 R9.2 27.65,16.469 v1(27.884,16.234) 28.119,16 R15.2 ; R16.2 36.65,23.6 v1(38.2,23.6)
+5LDO: C5.2 R2.2 u1.7 | length 9.5
  L3 w0.5: v1(32.6,22.3) 33.7,21.2 35.1,21.2 v1(36.2,20.1)
  Bottom Layer w0.254: u1.7 31.477,22.348 32.552,22.348 v1(32.6,22.3)
  Bottom Layer w0.8: R2.2 v1(36.2,20.1) 36.9,19.4 36.9,18.3 C5.2
+5V0: C12.2 J5.1 L2.2 R7.2 R14.2 u1.10 | length 47.4
  Top Layer w0.254: J5.1 6.3,14.3 8.4,14.3 9.773,12.927 11.373,12.927 15.2,9.1 C12.2 30.75,9.1 34.1,12.45 L2.2@34.1,13.1
  Top Layer w0.8: v1(30.6,20.2) 34.1,16.7 ; L2.2@34.1,13.1 34.1,16.7 ; L2.2@34.1,13.7 34.1,16.7
  Bottom Layer w0.254: u1.10 30.35,20.509 30.6,20.259 v1(30.6,20.2)
  Bottom Layer w0.8: R14.2 34.4,13.8 v1(34.5,13.7)
+REF: C9.1 R11.2 u1.1 | length 8
  Bottom Layer w0.254: u1.1@31.798,25.352 31.798,26.354 32.494,27.05 C9.1@34.05,27.05 ; R11.2 33.6,29.863 33.4,29.663 33.4,27.7 C9.1@34.05,27.05 ; C9.1 C9.1@34.05,27.05
+VIN: C1.2 C3.2 C10.2 J3.1 u1.6 U2.8 U3.8 | length 33.7
  Top Layer w0.254: C3.2 17.6,34.45 17.6,32.765 U2.8@17.76,32.605
  Top Layer w0.8: C10.2 15.45,18.15 16,18.7 ; 16.7,18.7 16,18.7 ; U2.8 17.76,32.605 16.405,32.605 15.6,31.8 15.6,19.1 16,18.7 ; 20.4,19.3 21.9,17.8 v1(21.9,16.9)
  Bottom Layer w0.254: u1.6 32.456,22.85 32.606,23 v1(32.7,23)
  Bottom Layer w0.8: v1(21.9,16.9) 21.9,18.05 C1.2 21.85,18.25 23.6,20 23.6,20.5 23.7,20.6
+VREF3: C7.1 R12.2 u1.5 | length 15.2
  Bottom Layer w0.254: u1.5 32.253,23.35 32.701,23.799 33.751,23.799 C7.1 34.673,22.877 35.213,22.877 35.531,23.195 35.531,24.202 35.929,24.6 37.4,24.6 37.795,24.995 37.795,26.456 37.551,26.7 36.349,26.7 36.2,26.849 36.2,28.1 35.5,28.8 34.3,28.8 R12.2
BOOT1: R18.2 u1.17 | length 2.6
  Top Layer w0.8: R18.2 24.55,21.15 24.7,21.3 v1(25.8,21.3)
  Bottom Layer w0.254: v1(25.8,21.3) 25.854,21.3 26.404,21.85 u1.17
BOOT2: R6.2 u1.24 | length 11.4
  Top Layer w0.8: v1(17.5,26.6) R6.2
  L2 w0.8: v1(17.5,26.6) 22.1,26.6 23.4,25.3 v1(25.8,25.3)
  Bottom Layer w0.254: v1(25.8,25.3) 25.848,25.348 26.723,25.348 u1.24
EN1: R17.1 u1.14 | length 6.9
  Bottom Layer w0.254: R17.1 23.8,18.3 24.7,19.2 28,19.2 28.35,19.55 u1.14
EN_LDO: R16.1 u1.4 | length 6.4
  Bottom Layer w0.254: u1.4 32.252,23.85 32.802,24.4 35.228,24.4 35.4,24.572 35.4,25.451 35.549,25.6 36.55,25.6 R16.1
FB1: R14.1 R15.1 R20.2 u1.11 | length 11.4
  Bottom Layer w0.254: u1.11 29.85,19.904 30.1,19.654 32.346,19.654 32.5,19.5 32.5,16.3 R14.1 ; R15.1 R14.1 ; R20.2 R14.1
GND: C1.1 C2.1 C3.1 C4.2 C5.1 C6.1 C7.2 C9.2 C10.1 C12.1 D1.2 D2.2 J2.1 J4.1 J6.1 R4.2 R5.2 R19.1 R20.1 u1.8 u1.21 u1.22 u1.29 u1.EP U2.2 U2.3 U3.2 U3.3 | length 50.2
  Top Layer w0.254: v1(10.9,30) 10.932,30.033 12.442,30.033 U2.3 ; v1(10.9,31.3) 10.917,31.318 12.457,31.318 U2.2 ; U3.3 11.992,16.183 13.482,16.183 v1(13.5,16.2) ; U3.2 11.992,17.418 13.482,17.418 v1(13.5,17.4)
  Top Layer w0.8: v1(4,7.9) D1.2 ; D2.2 v1(4.1,39.1) ; v1(8.7,9) 11.3,9 C12.1 10.8,9.7 v1(8.7,9.7) ; v1(9.6,38.1) 11.8,38.1 C6.1 11.9,38.8 v1(9.6,38.8) ; v1(14.3,34.6) 15.55,34.6 C3.1 ; C10.1 17.25,12.8 v1(18.6,12.8)
  Bottom Layer w0.254: u1.21 u1.22 27.65,24.35 v1(28,24.7) ; R4.2 28.75,28.7 29.4,28.05 v1(29.4,27.4) 29.352,27.352 29.352,25.977 u1.29 29.35,24.95 v1(29.1,24.7) ; v1(30.2,22.4) 30.602,21.998 31.006,21.998 31.154,21.85 u1.8 ; C9.2 34.35,25.35 35.534,26.534 35.534,27.034 v1(35.6,27.1)
  Bottom Layer w0.8: C1.1 20.35,17.9 20.35,16.95 v1(20.5,16.8) ; v1(20.4,25.1) 21.1,25.1 21.95,24.25 C2.1 ; v1(23.2,30.4) 23.65,30.85 24.55,30.85 24.75,31.05 C4.2 ; v1(27,32.9) R19.1 ; v1(29.5,14.2) R20.1 ; R5.2 33.45,20.05 v1(33.7,20.3) 33.7,20.5 34.2,21 C7.2 34.3,21.65 34.5,21.45 v1(34.5,20.3) 35.2,19.6 35.2,18.3 C5.1
  other v1: 28,22.4 29.1,22.4 28,23.5 29.1,23.6 30.2,23.6 30.2,24.7
LGATE1: u1.18 U3.4 | length 23.7
  Top Layer w0.254: v1(10.6,14.8) 10.647,14.848 11.927,14.848 U3.4
  L2 w0.8: v1(10.6,14.8) 10.6,19.9 13,22.3 v1(25.8,22.3)
  Bottom Layer w0.254: v1(25.8,22.3) 25.848,22.348 26.723,22.348 u1.18
LGATE2: u1.23 U2.4 | length 20
  Top Layer w0.254: v1(10.9,28.8) 10.902,28.798 12.472,28.798 U2.4
  L2 w0.8: v1(10.9,28.8) 12.9,28.8 17.7,24 v1(25.8,24)
  Bottom Layer w0.254: v1(25.8,24) 25.8,24.506 26.142,24.848 26.723,24.848 u1.23
NetC4_1: C4.1 R2.1 u1.3 | length 25.2
  L3 w0.8: v1(26,32.7) 29.9,28.8 33.5,28.8 34.4,27.9 34.4,25.6 33.8,25 ; v1(32.8,25) 33.8,25 ; v1(38.8,21.6) 37.5,21.6 34.1,25 33.8,25
  Bottom Layer w0.254: u1.3 31.477,24.352 32.152,24.352 v1(32.8,25)
  Bottom Layer w0.8: v1(26,32.7) 26,32.627 26.25,32.377 26.25,31.4 C4.1 ; R2.1 v1(38.8,21.6)
NetC8_2: C8.2 R6.1 | length 2
  Top Layer w0.254: R6.1 C8.2
NetC13_2: C13.2 R18.1 | length 2
  Top Layer w0.254: C13.2@20.85,21 R18.1@22.85,21
NetD1_1: D1.1 R7.1 | length 2.7
  Top Layer w0.254: D1.1 4.05,11 5.477,9.573 5.627,9.573 R7.1
NetD2_1: D2.1 R8.1 | length 2.6
  Top Layer w0.254: D2.1 4.15,36.075 5.502,37.427 5.627,37.427 R8.1
NetR4_1: R4.1 u1.31 | length 3.3
  Bottom Layer w0.254: u1.31 30.35,26.605 30.927,27.182 30.927,28.623 R4.1
NetR5_1: R5.1 u1.12 | length 4.8
  Bottom Layer w0.254: u1.12 29.35,19.55 29.6,19.3 30.9,19.3 31.127,19.073 31.127,18.523 R5.1
PHASE1: C13.1 L2.1 u1.16 U3.5 U3.6 U3.7 | length 17.2
  Top Layer w0.8: v1(18.7,17.5) 18.95,17.75 C13.1
  L2 w0.8: v1(18.7,14.9) v1(18.7,16.2) v1(18.7,17.5) 18.7,18.4 19.6,19.3 25.9,19.3 v1(26.4,19.8)
  Bottom Layer w0.254: v1(26.4,19.8) 26.4,19.954 27.35,20.904 u1.16
PHASE2: C8.1 L1.1 u1.25 U2.5 U2.6 U2.7 | length 17
  Top Layer w0.254: U2.5 U2.5@17.972,28.748 ; U2.6 U2.6@17.942,30.083 ; U2.7 U2.7@17.957,31.368 ; v1@19.4,31.335 19.367,31.368 v1(19.4,31.4) ; L1.1@20.727,31.977 22.7,33.95 L1.1 ; C8.1 24.85,26.5 v1(26.1,26.5)
  L2 w0.8: v1(19.4,31.4) v1(19.4,30.1) v1(19.4,28.7) 21.3,28.7 23.5,26.5 26.027,26.5 v1@26.064,26.464
  Bottom Layer w0.254: v1(26.1,26.5) 27.146,26.5 27.35,26.296 u1.25
POK1: R9.1 u1.13 u1.27 | length 18.2
  L3 w0.254: v1(27.7,27.2) 27.2,26.7 27.2,21.8 29.4,19.6 30.5,18.5 v1(30.5,17)
  Bottom Layer w0.254: v1(27.7,27.2) 28.348,26.552 28.348,25.977 u1.27 ; u1.13 28.85,19 29.55,18.3 R9.1 29.55,17.9 30.45,17 v1(30.5,17)
POK2: R10.1 u1.28 | length 4.3
  Bottom Layer w0.254: R10.1 26.7,28.7 27.6,27.8 28.4,27.8 28.85,27.35 u1.28
REFIN2: R11.1 R12.1 R13.1 R19.2 u1.32 | length 10
  Bottom Layer w0.4: R19.2 R13.1 R11.1 32,29.5 R12.1 32.6,27.9 32.3,27.6 31.949,27.6 30.85,26.501 u1.32
UGATE1: u1.15 U3.1 | length 18.3
  Top Layer w0.254: U3.1@11.972,18.703 U3.1 12.22,18.705 12.38,18.865 12.38,19.386 12.6,19.606 v1(12.6,19.7)
  L2 w0.5: 25.5,20.4 25.8,20.4 26.1,20.7 26.96,20.7 27.573,20.088 v1(27.6,20.088)
  L2 w0.8: v1(12.6,19.7) 13.3,20.4 25.5,20.4
  Bottom Layer w0.254: v1(27.6,20.088) 27.6,20.1 27.848,20.348 27.848,21.223 u1.15
UGATE2: u1.26 U2.1 | length 22.9
  Top Layer w0.254: v1(10.9,32.6) 10.902,32.603 12.472,32.603 U2.1
  L2 w0.8: v1(10.9,32.6) 23.6,32.6 26.6,29.6 v1(26.6,27.2)
  Bottom Layer w0.254: v1(26.6,27.2) 26.666,27.134 27.014,27.134 27.704,26.444 27.704,26.442 27.85,26.296 u1.26
pads on no net: MH1.1 MH2.1 MH3.1 MH4.1

## Polygon pours and split planes (outlines as drawn)
+5V0 on Top Layer "+5V0_L01_P013" (solid, remove dead copper, pour order 13): 2.4,16.5 9.5,16.5 9.5,14 14.2,14 14.2,11.6 18.9,11.6 18.9,9.7 25.4,9.7 25.4,19.2 38.9,19.2 38.9,6.5 7.9,6.5 7.9,7 2.3,7 2.4,7.1
PHASE1 on Top Layer "PHASE1_L01_P002" (solid, remove dead copper, pour order 2): 16.2,18.1 16.2,14.2 19.3,14.2 19.3,9.9 24.7,9.9 24.7,16.4 19.1,16.4 19.1,18.1
+VIN on Top Layer "+VIN_L01_P008" (solid, remove dead copper, pour order 8): 14.7,33.3 16.5,33.3 16.5,35.8 19.1,35.8 19.1,32.2 16.6,32.2 16.6,25.3 17.1,24.8 44.4,24.8 44.4,19.5 21.3,19.5 20.1,18.3 16.2,18.3 15.9,18 15.9,13.7 16.1,13.7 16.1,12 14.7,12
+3V3 on Top Layer "+3V3_L01_P012" (solid, remove dead copper, pour order 12): 2.7,39.9 2.7,30.5 9.5,30.5 9.5,33.8 13.5,33.8 13.6,33.9 13.6,36.2 19.8,36.2 19.8,38.1 28.5,38.1 29,37.6 29,26.9 38.3,26.9 38.5,27.1 38.5,41 9,41 9,39.9
+VIN on Top Layer "+VIN_L01_P003" (solid, remove dead copper, pour order 3): 16.5,35.8 18.4,35.8 18.4,33.2 19.1,33.2 19.1,32.2 16.5,32.2
no net on Top Layer "NONET_L01_P004" (solid, remove dead copper, pour order 4): 17.7,34.9
PHASE2 on Top Layer "PHASE2_L01_P000" (solid, pour order 0): 17,32 17,28 20,28 20,31 25.4,31 25.4,37.9 20.1,37.9 20.1,32
GND on L1 "GND_L02_P019" (solid, remove dead copper, pour order 19): 2,40 7,40 7,45 43,45 43,40 48,40 48,7 42.5,7 42.5,2 7.5,2 7.5,7 2,7
no net on L1 "NONET_L02_P014" (solid, remove dead copper, pour order 14): 2,40.5
GND on L4 "GND_L05_P020" (solid, remove dead copper, pour order 20): 2,40 7,40 7,45 43,45 43,40 48,40 48,7 42.5,7 42.5,2 7.5,2 7.5,7 2,7
+5_VCC on Bottom Layer "+5_VCC_L06_P007" (solid, remove dead copper, pour order 7): 25.8,32.2 29.3,32.2 29.3,29.9 25.8,29.9 25.8,27.8 25.3,27.8 25.3,23.4 23.2,23.4 23.2,29.1 23.7,29.1 23.7,30 23.9,30.2 25.8,30.2
+5_VCC on L3 "+5_VCC_L04_P022" (solid, remove dead copper, pour order 22): 21.2,30.1 21.2,14.9 21.8,14.3 40.1,14.3 40.1,25.6 38.75,26.95 27.45,26.95 27.45,30.05 27.4,30.1

## Silkscreen, mask and mechanical layers (free items; w line width, h text height)
Top Overlay:
  text "OUT 1" at 2.027,33 h2.5 r270
  text "+" at 7.841,32.3 h2.5 r270
  text "-" at 40.481,27.5 h2.5 r90
  text "-" at 7.819,27.4 h2.5 r270
  text "+" at 40.359,22.5 h2.5 r90
  text "INPUT" at 46.873,21 h2.5 r90
  text "OUT 2" at 2.027,20 h2.5 r270
  text "-" at 7.648,18.695 h2.5 r270
  text "+" at 7.811,13.583 h2.5 r270
Bottom Overlay:
  text "github.com/theonlyakhil" at 42.8,41.033 h1
  text "BlueSource" at 42.9,38.438 h3
  text "+" at 7.932,32.3 h2.5 r270
  text "-" at 7.731,27.5 h2.5 r270
  text "INPUT" at 46.668,27.2 h2.5 r90
  text "OUT 1" at 2.032,27 h2.5 r270
  text "-" at 40.569,26.9 h2.5 r90
  text "+" at 40.268,21.5 h2.5 r90
  text "-" at 7.496,18.695 h2.5 r270
  text "OUT 2" at 2.032,14 h2.5 r270
  text "+" at 7.918,13.541 h2.5 r270